# Altium PCB WebCamLight_RevA.PcbDoc
Units mil, origin at the board's own origin, x right, y up, seen from the top; angles counter-clockwise.
Board outline 3710 x 2510 mil, 2 copper layers (Top Layer, Bottom Layer); 68 components, 51 nets, 174 pads, 33 vias.
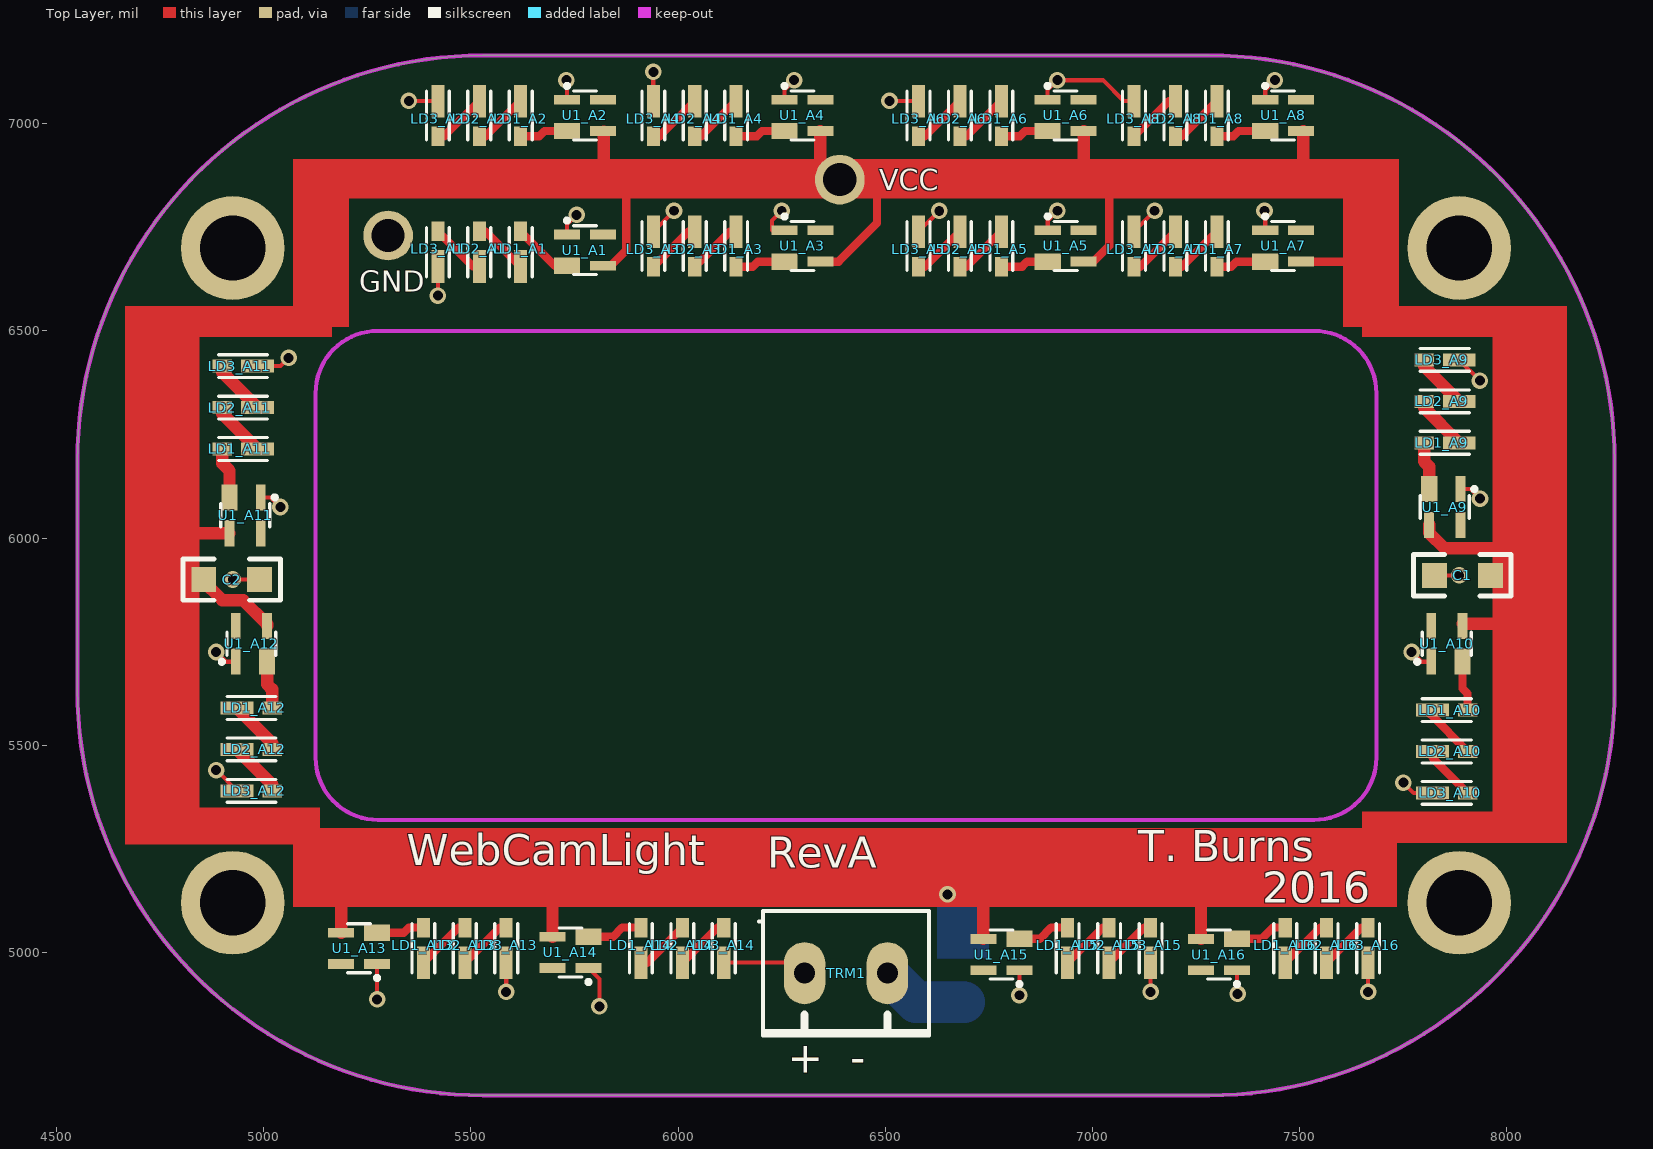
[diagram p0: Top Layer view]
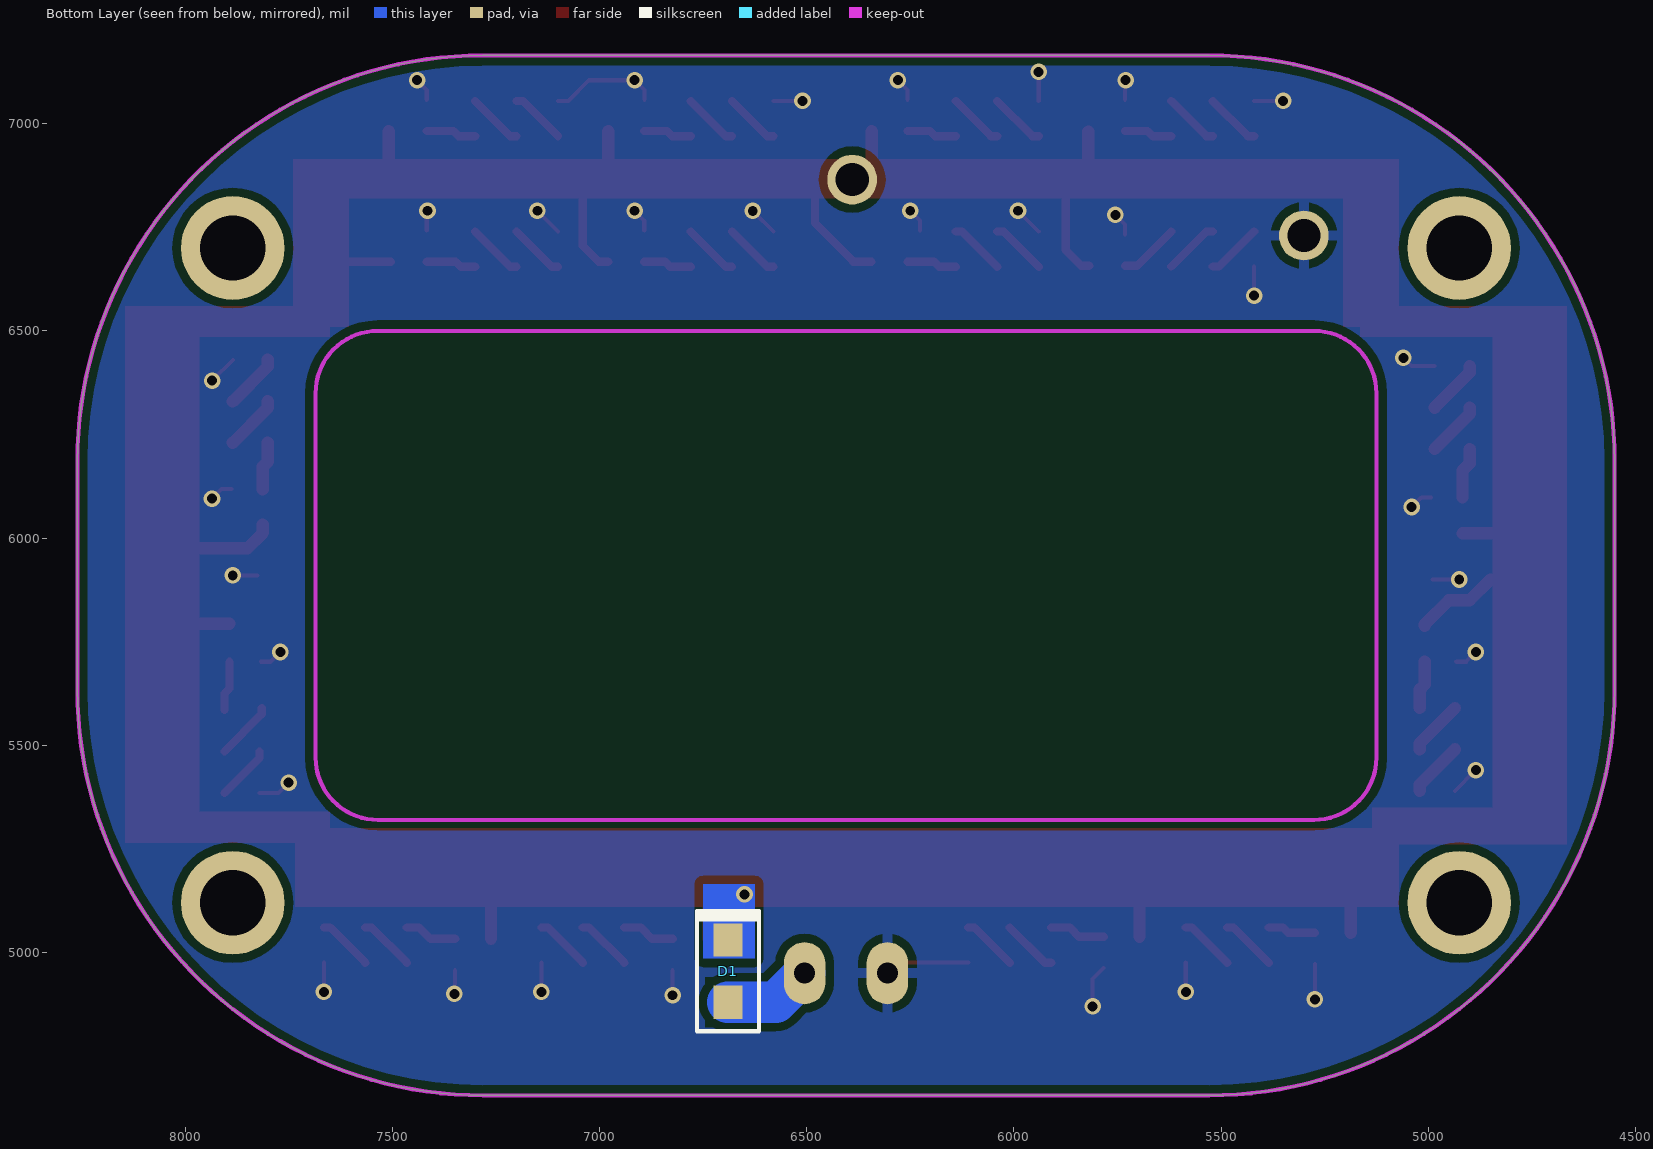
[diagram p1: Bottom Layer view, seen from below]
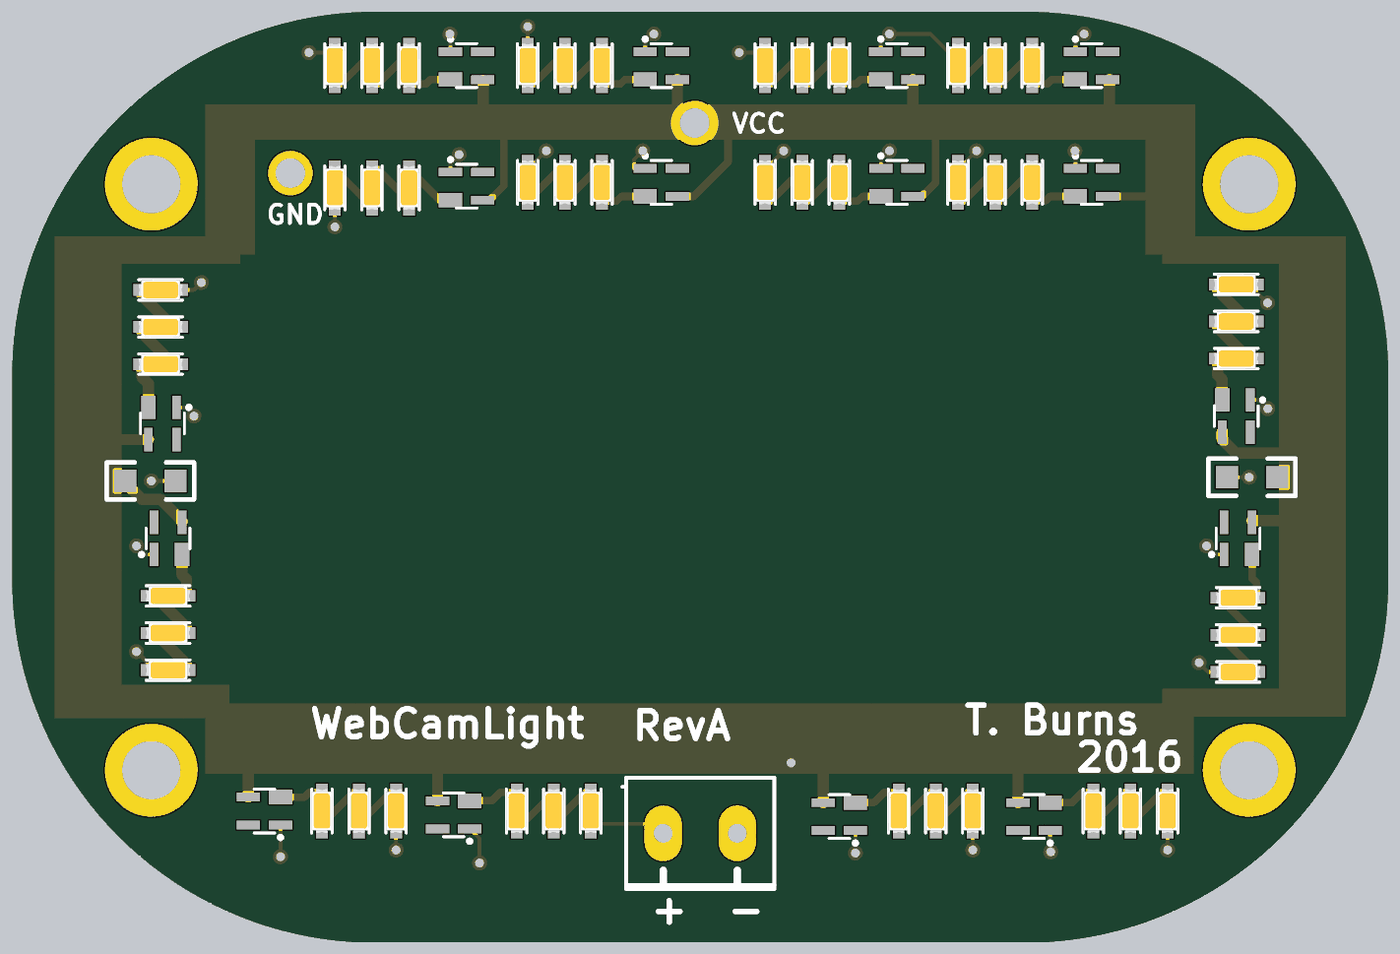
[diagram p2: 3D render of the assembled board from above, using the file's embedded part models]

## Layer stack, top to bottom
Top Layer: signal copper 1.4
Dielectric: core 12.6, FR-4, Dk 4.8
Bottom Layer: signal copper 1.4

## Board outline
4550,5633.98 4550,6186.02 cw(c5528.98,6186.02) 5528.98,7165 7281.02,7165 cw(c7281.02,6186.02) 8260,6186.02 8260,5633.98 cw(c7281.02,5633.98) 7281.02,4655 5528.98,4655 cw(c5528.98,5633.98)

## Design rules (kind name [scope] priority, off if disabled: settings)
Clearance Clearance_poly [InPoly] p1: gap=20
Clearance [All] p2: gap=7
ComponentClearance [All] p1 off: gap=10 collisioncheckmode=3 verticalgap=10 showdistances=FALSE
HoleSize [All] p1: absolutevalues=TRUE maxlimit=300 minlimit=24 maxpercent=80.000 minpercent=20.000
MinimumAnnularRing [All] p1: minimumring=8
PlaneClearance [All] p1: clearance=12
PlaneConnect [All] p1: planeconnectstyle=Relief reliefexpansion=25 reliefentries=4 reliefconductorwidth=10 reliefairgap=10
PolygonConnect PolygonConnect_via [IsVia] p1: connectstyle=Direct reliefconductorwidth=10 reliefentries=4 polygonreliefangle="90 Angle"
PolygonConnect [All] p2: connectstyle=Relief reliefconductorwidth=25 reliefentries=4 polygonreliefangle="90 Angle"
RoutingVias [All] p1: holewidth=24 width=40 viastyle="Through Hole" minholewidth=24 minwidth=35 maxholewidth=28 maxwidth=50
SolderMaskExpansion [All] p1: expansion=4
TestPointUsage [All] p1: valid=0 allowmultiple=FALSE
Testpoint [(IsPad And (OnTopLayer Or OnBottomLayer))] p1: side=3 testpointundercomponent=TRUE minsize=40 maxsize=100 preferedsize=60 minholesize=0 maxholesize=40 preferedholesize=32 testpointgrid=1 style=297 order=0123456789
Width [All] p1: maxlimit=300 minlimit=10 preferedwidth=10
15 further rules are at their usual default settings.

## Classes and differential pairs
channel class WebCamLight_Leds_RevA: A1 A2 A3 A4 A5 A6 A7 A8 A9 A10 B11 B12 B13 B14 B15 B16 B17 B18 B19 UL120 UL121 UL122 UL123 UL124 UL125 UL126 UL127 UL228 UL229 UL230 UL231 UL232 UL233 UL234 UL235 UL236

## Components (designator, comment, footprint, x,y, rotation, side; value= is the part's Value field where it differs from the comment)
C1 "47uF 25V" 1206 7960,5910 r180 top
C2 "47uF 25V" 1206 4855,5900 r0 top
D1 "DIODE_SS14" DO-214AC 6690,4880 r270 bottom
LD1_A1 "Green LED 0805" Wurth_1206_Led 5620,6740 r270 top (schematic designator LD1)
LD1_A2 "Green LED 0805" Wurth_1206_Led 5620,6970 r90 top (schematic designator LD1)
LD1_A3 "Green LED 0805" Wurth_1206_Led 6140,6655 r90 top (schematic designator LD1)
LD1_A4 "Green LED 0805" Wurth_1206_Led 6140,6970 r90 top (schematic designator LD1)
LD1_A5 "Green LED 0805" Wurth_1206_Led 6780,6655 r90 top (schematic designator LD1)
LD1_A6 "Green LED 0805" Wurth_1206_Led 6780,6970 r90 top (schematic designator LD1)
LD1_A7 "Green LED 0805" Wurth_1206_Led 7300,6655 r90 top (schematic designator LD1)
LD1_A8 "Green LED 0805" Wurth_1206_Led 7300,6970 r90 top (schematic designator LD1)
LD1_A9 "Green LED 0805" Wurth_1206_Led 7800,6230 r0 top (schematic designator LD1)
LD1_A10 "Green LED 0805" Wurth_1206_Led 7905,5585 r180 top (schematic designator LD1)
LD1_A11 "Green LED 0805" Wurth_1206_Led 4900,6215 r0 top (schematic designator LD1)
LD1_A12 "Green LED 0805" Wurth_1206_Led 5020,5590 r180 top (schematic designator LD1)
LD1_A13 "Green LED 0805" Wurth_1206_Led 5385,5060 r270 top (schematic designator LD1)
LD1_A14 "Green LED 0805" Wurth_1206_Led 5910,5060 r270 top (schematic designator LD1)
LD1_A15 "Green LED 0805" Wurth_1206_Led 6940,5060 r270 top (schematic designator LD1)
LD1_A16 "Green LED 0805" Wurth_1206_Led 7465,5060 r270 top (schematic designator LD1)
LD2_A1 "Green LED 0805" Wurth_1206_Led 5520,6740 r270 top (schematic designator LD2)
LD2_A2 "Green LED 0805" Wurth_1206_Led 5520,6970 r90 top (schematic designator LD2)
LD2_A3 "Green LED 0805" Wurth_1206_Led 6040,6655 r90 top (schematic designator LD2)
LD2_A4 "Green LED 0805" Wurth_1206_Led 6040,6970 r90 top (schematic designator LD2)
LD2_A5 "Green LED 0805" Wurth_1206_Led 6680,6655 r90 top (schematic designator LD2)
LD2_A6 "Green LED 0805" Wurth_1206_Led 6680,6970 r90 top (schematic designator LD2)
LD2_A7 "Green LED 0805" Wurth_1206_Led 7200,6655 r90 top (schematic designator LD2)
LD2_A8 "Green LED 0805" Wurth_1206_Led 7200,6970 r90 top (schematic designator LD2)
LD2_A9 "Green LED 0805" Wurth_1206_Led 7800,6330 r0 top (schematic designator LD2)
LD2_A10 "Green LED 0805" Wurth_1206_Led 7905,5485 r180 top (schematic designator LD2)
LD2_A11 "Green LED 0805" Wurth_1206_Led 4900,6315 r0 top (schematic designator LD2)
LD2_A12 "Green LED 0805" Wurth_1206_Led 5020,5490 r180 top (schematic designator LD2)
LD2_A13 "Green LED 0805" Wurth_1206_Led 5485,5060 r270 top (schematic designator LD2)
LD2_A14 "Green LED 0805" Wurth_1206_Led 6010,5060 r270 top (schematic designator LD2)
LD2_A15 "Green LED 0805" Wurth_1206_Led 7040,5060 r270 top (schematic designator LD2)
LD2_A16 "Green LED 0805" Wurth_1206_Led 7565,5060 r270 top (schematic designator LD2)
LD3_A1 "Green LED 0805" Wurth_1206_Led 5420,6740 r270 top (schematic designator LD3)
LD3_A2 "Green LED 0805" Wurth_1206_Led 5420,6970 r90 top (schematic designator LD3)
LD3_A3 "Green LED 0805" Wurth_1206_Led 5940,6655 r90 top (schematic designator LD3)
LD3_A4 "Green LED 0805" Wurth_1206_Led 5940,6970 r90 top (schematic designator LD3)
LD3_A5 "Green LED 0805" Wurth_1206_Led 6580,6655 r90 top (schematic designator LD3)
LD3_A6 "Green LED 0805" Wurth_1206_Led 6580,6970 r90 top (schematic designator LD3)
LD3_A7 "Green LED 0805" Wurth_1206_Led 7100,6655 r90 top (schematic designator LD3)
LD3_A8 "Green LED 0805" Wurth_1206_Led 7100,6970 r90 top (schematic designator LD3)
LD3_A9 "Green LED 0805" Wurth_1206_Led 7800,6430 r0 top (schematic designator LD3)
LD3_A10 "Green LED 0805" Wurth_1206_Led 7905,5385 r180 top (schematic designator LD3)
LD3_A11 "Green LED 0805" Wurth_1206_Led 4900,6415 r0 top (schematic designator LD3)
LD3_A12 "Green LED 0805" Wurth_1206_Led 5020,5390 r180 top (schematic designator LD3)
LD3_A13 "Green LED 0805" Wurth_1206_Led 5585,5060 r270 top (schematic designator LD3)
LD3_A14 "Green LED 0805" Wurth_1206_Led 6110,5060 r270 top (schematic designator LD3)
LD3_A15 "Green LED 0805" Wurth_1206_Led 7140,5060 r270 top (schematic designator LD3)
LD3_A16 "Green LED 0805" Wurth_1206_Led 7665,5060 r270 top (schematic designator LD3)
TRM1 "Wurth 2way screw terminal" TERM_2POS_HORIZ_5.08MM 6305,4950 r0 top
U1_A1 "Led Driver" SOT192P237X110-4M 5775,6695 r0 top (schematic designator U1)
U1_A2 "Led Driver" SOT192P237X110-4M 5775,7020 r0 top (schematic designator U1)
U1_A3 "Led Driver" SOT192P237X110-4M 6300,6705 r0 top (schematic designator U1)
U1_A4 "Led Driver" SOT192P237X110-4M 6300,7020 r0 top (schematic designator U1)
U1_A5 "Led Driver" SOT192P237X110-4M 6935.31,6705 r0 top (schematic designator U1)
U1_A6 "Led Driver" SOT192P237X110-4M 6935,7020 r0 top (schematic designator U1)
U1_A7 "Led Driver" SOT192P237X110-4M 7460,6705 r0 top (schematic designator U1)
U1_A8 "Led Driver" SOT192P237X110-4M 7460,7020 r0 top (schematic designator U1)
U1_A9 "Led Driver" SOT192P237X110-4M 7850,6075 r270 top (schematic designator U1)
U1_A10 "Led Driver" SOT192P237X110-4M 7855,5745 r90 top (schematic designator U1)
U1_A11 "Led Driver" SOT192P237X110-4M 4955,6055 r270 top (schematic designator U1)
U1_A12 "Led Driver" SOT192P237X110-4M 4970,5745 r90 top (schematic designator U1)
U1_A13 "Led Driver" SOT192P237X110-4M 5230,5010 r180 top (schematic designator U1)
U1_A14 "Led Driver" SOT192P237X110-4M 5740,5000 r180 top (schematic designator U1)
U1_A15 "Led Driver" SOT192P237X110-4M 6780,4995 r180 top (schematic designator U1)
U1_A16 "Led Driver" SOT192P237X110-4M 7305,4995 r180 top (schematic designator U1)

## Footprints (in the part's own frame and the unit in brackets; to place one, negate y for a bottom-side part, rotate by r counter-clockwise, add the part's x,y. Pads: shape width x height; smd on the part's side, far side on the other; paste and mask are expansions set on the pad)
1206 [mil]
  rect 60x60 smd: 1(0,0) 2(135,0)
  silkscreen extent -50,-50 185,50
DO-214AC [mil]
  rect 80x70 smd: A(0,0) K(-150,0)
  silkscreen extent -220,-75 70,75
SOT192P237X110-4M [mm] "SOT143, 4-Leads, Body 3.0x2.6mm (max), Pitch 1.92mm, IPC Low Density"
  rect 1.6x0.6 smd: 1(-1.1,0.96) 3(1.1,-0.96) 4(1.1,0.96)
  rect 1.6x1 smd: 2(-1.1,-0.96)
  silkscreen extent -1.22,-1.5 0.7,1.93, body extent -0.7,-1.52 0.7,1.52, height 1.1
TERM_2POS_HORIZ_5.08MM [mil]
  oval 100x150 hole 51: 1(0,0) 2(200,0)
  silkscreen extent -110,-150 300,150
Wurth_1206_Led [mm]
  rect 2x0.8 smd: 1(2.15,0)
  rect 1.2x0.8 smd: 2(0,0)
  silkscreen extent -0.23,-0.7 2.77,0.7, body extent -0.23,-0.7 2.77,0.7, height 0.8

## Part data
C1 C2: library part CAP_47uF_25V_20%_1206, "CAP CER 47uF 25V 20% X5R 1206"
D1: "Schottky Diode, 1A, 40V SS14"
LD1_A1 LD1_A2 LD1_A3 LD1_A4 LD1_A5 LD1_A6 LD1_A7 LD1_A8 LD1_A9 LD1_A10 LD1_A11 LD1_A12 LD1_A13 LD1_A14 LD1_A15 LD1_A16 LD2_A1 LD2_A2 LD2_A3 LD2_A4 LD2_A5 LD2_A6 LD2_A7 LD2_A8 LD2_A9 LD2_A10 LD2_A11 LD2_A12 LD2_A13 LD2_A14 LD2_A15 LD2_A16 LD3_A1 LD3_A2 LD3_A3 LD3_A4 LD3_A5 LD3_A6 LD3_A7 LD3_A8 LD3_A9 LD3_A10 LD3_A11 LD3_A12 LD3_A13 LD3_A14 LD3_A15 LD3_A16: library part LED_White_1206, "WL-SMCW SMD CHIP LED WATERCLEAR"
TRM1: library part TRM_2way_ScrewTerminal, "TERM BLOCK 2POS HORIZ 5.08MM T/H"
U1_A1 U1_A2 U1_A3 U1_A4 U1_A5 U1_A6 U1_A7 U1_A8 U1_A9 U1_A10 U1_A11 U1_A12 U1_A13 U1_A14 U1_A15 U1_A16: library part IC_LED_DRV_BCR401R, "20-60mA Led Driver"

## Free pads (board coordinates)
  round 250 hole 157: 0(4925,5120) 0(4925,6700) 0(7885,5120) 0(7885,6700)
  round 120 hole 80: 0(5300,6730) 0(6390,6865)

## Via types
v1: diameter 40, hole 24, Top Layer to Bottom Layer, tented both sides, 33 vias

## Nets (pads, with @x,y where several pads share a name; then routed paths per layer and width w, separated by ;. In a path a pad name is that pad's centre, name@x,y a point inside that pad or via, vN(x,y) a via of type N, cw(c..) or ccw(c..) an arc to the next point about the centre after c; other vN are vias at no path point)
GND: C1.2 C2.2 LD3_A1.1 LD3_A2.1 LD3_A3.1 LD3_A4.1 LD3_A5.1 LD3_A6.1 LD3_A7.1 LD3_A8.1 LD3_A9.1 LD3_A10.1 LD3_A11.1 LD3_A12.1 LD3_A13.1 LD3_A14.1 LD3_A15.1 LD3_A16.1 pad.0@5300,6730 TRM1.1 U1_A1.1 U1_A2.1 U1_A3.1 U1_A4.1 U1_A5.1 U1_A6.1 U1_A7.1 U1_A8.1 U1_A9.1 U1_A10.1 U1_A11.1 U1_A12.1 U1_A13.1 U1_A14.1 U1_A15.1 U1_A16.1 | length 2519.7
  Top Layer w10: v1(4885,5440) 4885.35,5440 LD3_A12.1 ; v1(4885,5725) 4908.31,5701.69 U1_A12.1 ; v1(4925,5900) C2.2 ; LD3_A11.1 5040,6415 v1(5060,6435) ; U1_A11.1 5016.69,6098.31 v1(5040,6075) ; v1(5273.31,4886.69) U1_A13.1 ; v1(5350,7055) 5350.35,7054.65 LD3_A2.1 ; v1(5420,6585) LD3_A1.1 ; v1(5585,4905) LD3_A13.1 ; v1(5730,7105) 5731.69,7103.31 U1_A2.1 ; U1_A1.1 5731.69,6756.69 v1(5755,6780) ; U1_A14.1 5810,4935.51 v1(5810,4870) ; LD3_A3.1 5990,6789.65 v1(5990,6790) ; LD3_A4.1 v1(5940,7125) ; LD3_A14.1 6279.65,4975.35 TRM1.1 ; U1_A3.1@6226.69,6742.8 6226.69,6766.69 v1(6250,6790) ; U1_A4.1 6256.69,7081.69 v1(6280,7105) ; v1(6510,7055) 6510.35,7054.65 LD3_A6.1 ; LD3_A5.1 v1(6630,6789.65) v1@6630,6790 ; v1(6823.31,4896.69) U1_A15.1 ; U1_A6.1 6891.69,7081.69 v1(6915,7105) 7025,7105 7075.35,7054.65 LD3_A8.1 ; U1_A5.1 6892.01,6766.69 v1(6915.31,6790) ; LD3_A7.1 7150,6789.65 v1(7150,6790) ; v1(7140,4905) LD3_A15.1 ; U1_A16.1 7348.31,4901.69 v1(7350,4900) ; v1(7415,6790) 7416.69,6788.31 U1_A7.1 ; U1_A8.1 7416.69,7081.69 v1(7440,7105) ; v1(7665,4905) LD3_A16.1 ; v1(7750,5410) 7775,5385 LD3_A10.1 ; v1(7770,5725) 7793.31,5701.69 U1_A10.1 ; C1.2 v1(7885,5910) ; LD3_A9.1 v1(7934.65,6380) v1@7935,6380 ; U1_A9.1 7911.69,6118.31 v1(7935,6095)
NetD1_A: D1.A TRM1.2 | length 214
  Bottom Layer w100: TRM1.2 6575,4880 D1.A
NetLD1_A1_1: LD1_A1.1 LD2_A1.2 | length 135.1
  Top Layer w20: LD2_A1.2 5535.35,6740 LD1_A1.1
NetLD1_A1_2: LD1_A1.2 U1_A1.2 | length 146
  Top Layer w20: LD1_A1.2 5702.8,6657.2 U1_A1.2
NetLD1_A2_1: LD1_A2.1 LD2_A2.2 | length 135.1
  Top Layer w20: LD2_A2.2 5535.35,6970 LD1_A2.1
NetLD1_A2_2: LD1_A2.2 U1_A2.2 | length 116.7
  Top Layer w20: LD1_A2.2 5665,6970 5677.2,6982.2 U1_A2.2
NetLD1_A3_1: LD1_A3.1 LD2_A3.2 | length 135.1
  Top Layer w20: LD2_A3.2 6124.65,6739.65 LD1_A3.1
NetLD1_A3_2: LD1_A3.2 U1_A3.2 | length 121.7
  Top Layer w20: LD1_A3.2 6180,6655 6192.2,6667.2 U1_A3.2
NetLD1_A4_1: LD1_A4.1 LD2_A4.2 | length 135.1
  Top Layer w20: LD2_A4.2 6055.35,6970 LD1_A4.1
NetLD1_A4_2: LD1_A4.2 U1_A4.2 | length 121.7
  Top Layer w20: LD1_A4.2 6190,6970 6202.2,6982.2 U1_A4.2
NetLD1_A5_1: LD1_A5.1 LD2_A5.2 | length 135.1
  Top Layer w20: LD2_A5.2 6695.35,6655 LD1_A5.1
NetLD1_A5_2: LD1_A5.2 U1_A5.2 | length 117.1
  Top Layer w20: LD1_A5.2 6830,6655 6842.2,6667.2 U1_A5.2
NetLD1_A6_1: LD1_A6.1 LD2_A6.2 | length 135.1
  Top Layer w20: LD2_A6.2 6695.35,6970 LD1_A6.1
NetLD1_A6_2: LD1_A6.2 U1_A6.2 | length 116.7
  Top Layer w20: LD1_A6.2 6825,6970 6837.2,6982.2 U1_A6.2
NetLD1_A7_1: LD1_A7.1 LD2_A7.2 | length 135.1
  Top Layer w20: LD2_A7.2 7215.35,6655 LD1_A7.1
NetLD1_A7_2: LD1_A7.2 U1_A7.2 | length 121.7
  Top Layer w20: LD1_A7.2 7335,6655 7347.2,6667.2 U1_A7.2
NetLD1_A8_1: LD1_A8.1 LD2_A8.2 | length 135.1
  Top Layer w20: LD2_A8.2 7215.35,6970 LD1_A8.1
NetLD1_A8_2: LD1_A8.2 U1_A8.2 | length 121.7
  Top Layer w20: LD1_A8.2 7340,6970 7352.2,6982.2 U1_A8.2
NetLD1_A9_1: LD1_A9.1 LD2_A9.2 | length 135.1
  Top Layer w30: LD2_A9.2 7800,6314.65 LD1_A9.1
NetLD1_A9_2: LD1_A9.2 U1_A9.2 | length 116.7
  Top Layer w30: LD1_A9.2 7800,6185 7812.2,6172.8 U1_A9.2
NetLD1_A10_1: LD1_A10.1 LD2_A10.2 | length 142.3
  Top Layer w20: LD1_A10.1@7815,5590 7815,5575 LD2_A10.2
NetLD1_A10_2: LD1_A10.2 U1_A10.2 | length 121.7
  Top Layer w20: U1_A10.2 7892.8,5637.2 7905,5625 LD1_A10.2
NetLD1_A11_1: LD1_A11.1 LD2_A11.2 | length 135.1
  Top Layer w30: LD2_A11.2 4900,6299.65 LD1_A11.1
NetLD1_A11_2: LD1_A11.2 U1_A11.2 | length 123.8
  Top Layer w30: LD1_A11.2 4900,6180 4917.2,6162.8 U1_A11.2
NetLD1_A12_1: LD1_A12.1 LD2_A12.2 | length 135.1
  Top Layer w30: LD1_A12.1 5020,5505.35 LD2_A12.2
NetLD1_A12_2: LD1_A12.2 U1_A12.2 | length 116.7
  Top Layer w30: U1_A12.2 5007.8,5647.2 5020,5635 LD1_A12.2
NetLD1_A13_1: LD1_A13.1 LD2_A13.2 | length 135.1
  Top Layer w20: LD1_A13.1 5469.65,5060 LD2_A13.2
NetLD1_A13_2: LD1_A13.2 U1_A13.2 | length 116.7
  Top Layer w20: U1_A13.2 5337.8,5047.8 5350,5060 LD1_A13.2
NetLD1_A14_1: LD1_A14.1 LD2_A14.2 | length 135.1
  Top Layer w20: LD1_A14.1 5925.35,4975.35 LD2_A14.2
NetLD1_A14_2: LD1_A14.2 U1_A14.2 | length 135.9
  Top Layer w20: U1_A14.2 5842.8,5037.8 5865,5060 LD1_A14.2
NetLD1_A15_1: LD1_A15.1 LD2_A15.2 | length 135.1
  Top Layer w20: LD1_A15.1 7024.65,5060 LD2_A15.2
NetLD1_A15_2: LD1_A15.2 U1_A15.2 | length 128
  Top Layer w20: U1_A15.2 6872.8,5032.8 6900,5060 LD1_A15.2
NetLD1_A16_1: LD1_A16.1 LD2_A16.2 | length 135.1
  Top Layer w20: LD1_A16.1 7549.65,5060 LD2_A16.2
NetLD1_A16_2: LD1_A16.2 U1_A16.2 | length 128
  Top Layer w20: U1_A16.2 7407.8,5032.8 7435,5060 LD1_A16.2
NetLD2_A1_1: LD2_A1.1 LD3_A1.2 | length 135.1
  Top Layer w20: LD3_A1.2 5504.65,6655.35 LD2_A1.1
NetLD2_A2_1: LD2_A2.1 LD3_A2.2 | length 135.1
  Top Layer w20: LD3_A2.2 5435.35,6970 LD2_A2.1
NetLD2_A3_1: LD2_A3.1 LD3_A3.2 | length 135.1
  Top Layer w20: LD3_A3.2 6024.65,6739.65 LD2_A3.1
NetLD2_A4_1: LD2_A4.1 LD3_A4.2 | length 135.1
  Top Layer w20: LD3_A4.2 5955.35,6970 LD2_A4.1
NetLD2_A5_1: LD2_A5.1 LD3_A5.2 | length 135.1
  Top Layer w20: LD3_A5.2 6595.35,6655 LD2_A5.1
NetLD2_A6_1: LD2_A6.1 LD3_A6.2 | length 135.1
  Top Layer w20: LD3_A6.2 6595.35,6970 LD2_A6.1
NetLD2_A7_1: LD2_A7.1 LD3_A7.2 | length 135.1
  Top Layer w20: LD3_A7.2 7115.35,6655 LD2_A7.1
NetLD2_A8_1: LD2_A8.1 LD3_A8.2 | length 135.1
  Top Layer w20: LD3_A8.2 7184.65,7054.65 LD2_A8.1
NetLD2_A9_1: LD2_A9.1 LD3_A9.2 | length 135.1
  Top Layer w30: LD3_A9.2 7800,6414.65 LD2_A9.1
NetLD2_A10_1: LD2_A10.1 LD3_A10.2 | length 135.1
  Top Layer w20: LD2_A10.1 7820.35,5469.65 LD3_A10.2
NetLD2_A11_1: LD2_A11.1 LD3_A11.2 | length 135.1
  Top Layer w30: LD3_A11.2 4900,6399.65 LD2_A11.1
NetLD2_A12_1: LD2_A12.1 LD3_A12.2 | length 135.1
  Top Layer w30: LD2_A12.1 5020,5405.35 LD3_A12.2
NetLD2_A13_1: LD2_A13.1 LD3_A13.2 | length 135.1
  Top Layer w20: LD2_A13.1 5569.65,5060 LD3_A13.2
NetLD2_A14_1: LD2_A14.1 LD3_A14.2 | length 135.1
  Top Layer w20: LD2_A14.1 6094.65,5060 LD3_A14.2
NetLD2_A15_1: LD2_A15.1 LD3_A15.2 | length 135.1
  Top Layer w20: LD2_A15.1 7124.65,5060 LD3_A15.2
NetLD2_A16_1: LD2_A16.1 LD3_A16.2 | length 135.1
  Top Layer w20: LD2_A16.1 7649.65,5060 LD3_A16.2
VCC: C1.1 C2.1 D1.K pad.0@6390,6865 U1_A1.3 U1_A2.3 U1_A3.3 U1_A4.3 U1_A5.3 U1_A6.3 U1_A7.3 U1_A8.3 U1_A9.3 U1_A10.3 U1_A11.3 U1_A12.3 U1_A13.3 U1_A14.3 U1_A15.3 U1_A16.3 | length 2223.5
  Top Layer w20: U1_A1.3 5837.2,6657.2 5875,6695 5875,6875 ; U1_A3.3 6387.2,6667.2 6480,6760 6480,6850 ; U1_A5.3 7002.2,6667.2 7040,6705 7040,6845 ; U1_A7.3 7622.2,6667.2 7630,6675
  Top Layer w30: 4818.31,6011.69 U1_A11.3 ; C2.1@4850,5900 4900,5850 4950,5850 5007.8,5792.2 U1_A12.3 ; U1_A13.3 5186.69,5143.31 ; U1_A14.3 5696.69,5143.31 ; 5820,6885 U1_A2.3@5820,6980.51 ; pad.0@6343.31,6896.69 U1_A4.3 ; U1_A15.3 6736.69,5133.31 ; 6978.31,6901.69 U1_A6.3 ; U1_A16.3 7261.69,5133.31 ; 7508.31,6891.69 U1_A8.3@7508.31,6982.2 ; U1_A9.3@7812.76,6032.24 7812.2,6032.8 U1_A9.3 7812.2,6012.8 7850,5975 7980,5975 ; U1_A10.3@7892.8,5793.31 7988.31,5793.31
  other v1: 6650,5140
pads on no net: U1_A1.4 U1_A2.4 U1_A3.4 U1_A4.4 U1_A5.4 U1_A6.4 U1_A7.4 U1_A8.4 U1_A9.4 U1_A10.4 U1_A11.4 U1_A12.4 U1_A13.4 U1_A14.4 U1_A15.4 U1_A16.4

## Polygon pours and split planes (outlines as drawn)
GND on Bottom Layer "GND" (solid, remove dead copper, pour order 0): 4550,7165 8260,7165 8260,4655 4550,4655

## Keep-outs
Keep-Out Layer:
  lines w10: 4550,5633.98 ccw(c5528.98,5633.98) 5528.98,4655 7281.02,4655 ccw(c7281.02,5633.98) 8260,5633.98 8260,6186.02 ccw(c7281.02,6186.02) 7281.02,7165 5528.98,7165 ccw(c5528.98,6186.02) 4550,6186.02 4550,5633.98 ; 5125,5470 ccw(c5275,5470) 5275,5320 7535,5320 ccw(c7535,5470) 7685,5470 7685,6350 ccw(c7535,6350) 7535,6500 5275,6500 ccw(c5275,6350) 5125,6350 5125,5470

## Other copper
Top Layer:
  rectangle net VCC: 4665,5260 5135,5350
  region net VCC: 5165,6560 4815,6560 4815,6485 5165,6485
  region net VCC: 5205,6915 5070,6915 5070,6510 5205,6510
  rectangle net VCC: 7605,6510 7740,6915
  rectangle net VCC: 7650,6485 7995,6560
  rectangle net VCC: 4665,5335 4845,6560
  region net VCC: 8145,6560 7965,6560 7965,5335 8145,5335
  region net VCC: 8145,5340 7650,5340 7650,5263.66 8145,5263.66
  rectangle net VCC: 5070,5110 7735,5300
  rectangle net VCC: 5075,6820 7680,6915
Bottom Layer:
  rectangle net VCC: 6625,4985 6750,5165

## Silkscreen, mask and mechanical layers (free items; w line width, h text height)
Top Overlay:
  text "VCC" at 6485,6840 h50
  text "GND" at 5230,6595 h50
  text "T. Burns" at 7110,5220 h75
  text "WebCamLight" at 5345,5210 h75
  text "RevA" at 6215,5205 h75
  text "2016" at 7410,5120 h75
  text "+  -" at 6265,4710 h75
Mechanical 1:
  the board outline again, w10
Mechanical 2:
  circle w78.74: c6405,5910 r1968.5
Mechanical 3:
  lines w10: 4550,5910 6405,5910 ; 5125,5320 7685,6500 ; 5125,6500 7685,5320 ; 6405,4800 6405,5910 ; 6405,7165 6405,5910 ; 6530,6755 6530,7210 ; 7050,6750 7050,7130 ; 8260,5910 6405,5910

## Dimensions
8260,6186.02 to 4550,6186.02 on Mechanical 2
7281.02,4655 to 5528.98,7165 on Mechanical 2
7535,6500 to 7535,5320 on Mechanical 2
5125,6350 to 7685,6350 on Mechanical 2
4550,6186.02 to 8260,6186.02 on Mechanical 3
7685,6350 to 8260,6186.02 on Mechanical 3
5125,6350 to 4550,6186.02 on Mechanical 3
5275,6500 to 5528.98,7165 on Mechanical 3
5275,5320 to 5528.98,4655 on Mechanical 3
5125,5470 to 7685,5470 on Mechanical 3
5275,6500 to 5275,5320 on Mechanical 3